# EAGLE board Full_Adder_Circuit (EAGLE 9.7.0)

Size 155.55 x 53.83 mm. Coordinates in mm from the lower left corner, seen from the top.
Outline: 0,0 155.55,0 155.55,53.83 0,53.83 0,0
Copper layers (1*16): Top 0.035mm / dielectric 1.5mm / Bottom 0.035mm
Design rules "default": minimum track width 6mil, minimum drill 0.35mm, track to track 6mil, track to pad 6mil, pad to pad 6mil, via to via 6mil, smd to smd 6mil, copper to edge 40mil, drill to drill 6mil, minimum pad ring 10mil, minimum via ring 8mil, stop-mask expansion 4mil, vias tented up to drill 0mil, thermal gap 10mil

## Footprints (pad centres in the part's own frame; a part is rotated, then mirrored left to right if it is on the bottom)
LEDRD254W60D565H860B_G = drill 0.981 pad 1.581: 1 -1.27,0; 2 1.27,0
LEDRD254W60D565H860B = drill 0.981 pad 1.581: 1 -1.27,0; 2 1.27,0
BATTERY-GENERIC = drill 1.118 pad 3.15 octagon: + 2.54,0; - -2.54,0
RESAD1016W63L850D250B = drill 0.83 pad 1.43: 1 -5.08,0; 2 5.08,0
78B04ST = drill 0.8: 1 -3.81,-3.81; 2 -1.27,-3.81; 3 1.27,-3.81; 4 3.81,-3.81; 5 3.81,3.81; 6 1.27,3.81; 7 -1.27,3.81; 8 -3.81,3.81
DIP762W53P254L1969H508Q14B = drill 0.743 pad 1.343: 1 -3.81,7.62; 2 -3.81,5.08; 3 -3.81,2.54; 4 -3.81,0; 5 -3.81,-2.54; 6 -3.81,-5.08; 7 -3.81,-7.62; 8 3.81,-7.62; 9 3.81,-5.08; 10 3.81,-2.54; 11 3.81,0; 12 3.81,2.54; 13 3.81,5.08; 14 3.81,7.62

## Placement (x,y rotation side)
D1  GREEN  [LEDRD254W60D565H860B_G]  147.95,16.59 180 top
D2  RED  [LEDRD254W60D565H860B]  140.33,16.59 180 top
P1  BATTERYGENERIC  [BATTERY-GENERIC]  8.26,45.57 180 top
R4  1k  [RESAD1016W63L850D250B]  141.6,8.97 90 top
R5  1k  [RESAD1016W63L850D250B]  149.22,8.97 90 top
SW1  SPST-478B04ST  [78B04ST]  13.33,10.24 0 top
U1  74HC00_PDIP  [DIP762W53P254L1969H508Q14B]  80.64,10.24 90 top
U2  74HC00_PDIP  [DIP762W53P254L1969H508Q14B]  108.58,10.24 90 top
U3  74HC00_PDIP  [DIP762W53P254L1969H508Q14B]  52.7,10.24 90 top

## Library data of the parts
D1 = Tinkercad; CATEGORY: Opto-Electronic; SUB-CATEGORY: LED; VALUE: LED_GREEN
D2 = Tinkercad; CATEGORY: Opto-Electronic; SUB-CATEGORY: LED; VALUE: LED_RED
P1 R4 R5 SW1 U1-U3 = Tinkercad

## Nets
D1_A: D1.1 R5.2
D2_A: D2.1 R4.2
P1+: P1.+ SW1.6 SW1.7 SW1.8 U1.14 U2.14 U3.14
P1-: D1.2 D2.2 P1.- U1.7 U2.7 U3.7
U1_3Y: U1.8 U2.9
U1_4A: SW1.3 U1.12 U2.12
U1_4Y: U1.10 U1.11 U2.1 U2.13
U2_1Y: R5.1 U2.3
U2_3Y: R4.1 U2.8
U2_4Y: U2.10 U2.11
U3_1A: SW1.1 U3.1 U3.5
U3_1Y: U2.2 U3.3 U3.4 U3.13
U3_2Y: U3.6 U3.9
U3_3Y: U1.9 U1.13 U3.8
U3_4A: SW1.2 U3.2 U3.12
U3_4Y: U3.10 U3.11

## Tracks (layer width: path | path; a pad name or v marks a point on that pad's centre or on a via)
D1_A  (1 unrouted)
D2_A  (1 unrouted)
P1+  (6 unrouted)
P1-  (5 unrouted)
U1_3Y  (1 unrouted)
U1_4A  (2 unrouted)
U1_4Y  (3 unrouted)
U2_1Y  (1 unrouted)
U2_3Y  (1 unrouted)
U2_4Y  (1 unrouted)
U3_1A  (2 unrouted)
U3_1Y  (3 unrouted)
U3_2Y  (1 unrouted)
U3_3Y  (2 unrouted)
U3_4A  (2 unrouted)
U3_4Y  (1 unrouted)